# Altium PCB Audio_testboard.PcbDoc (part 5 of 6)
Units mm, origin at the board's own origin, x right, y up, seen from the top; angles counter-clockwise.
Board outline 220.73 x 144.32 mm, 4 copper layers (Top Layer, Mid-Layer 1, Mid-Layer 2, Bottom Layer), stack 1.894 mm thick; 462 components, 310 nets, 1757 pads, 740 vias.
Unrouted connection lines stored in the file: 5.
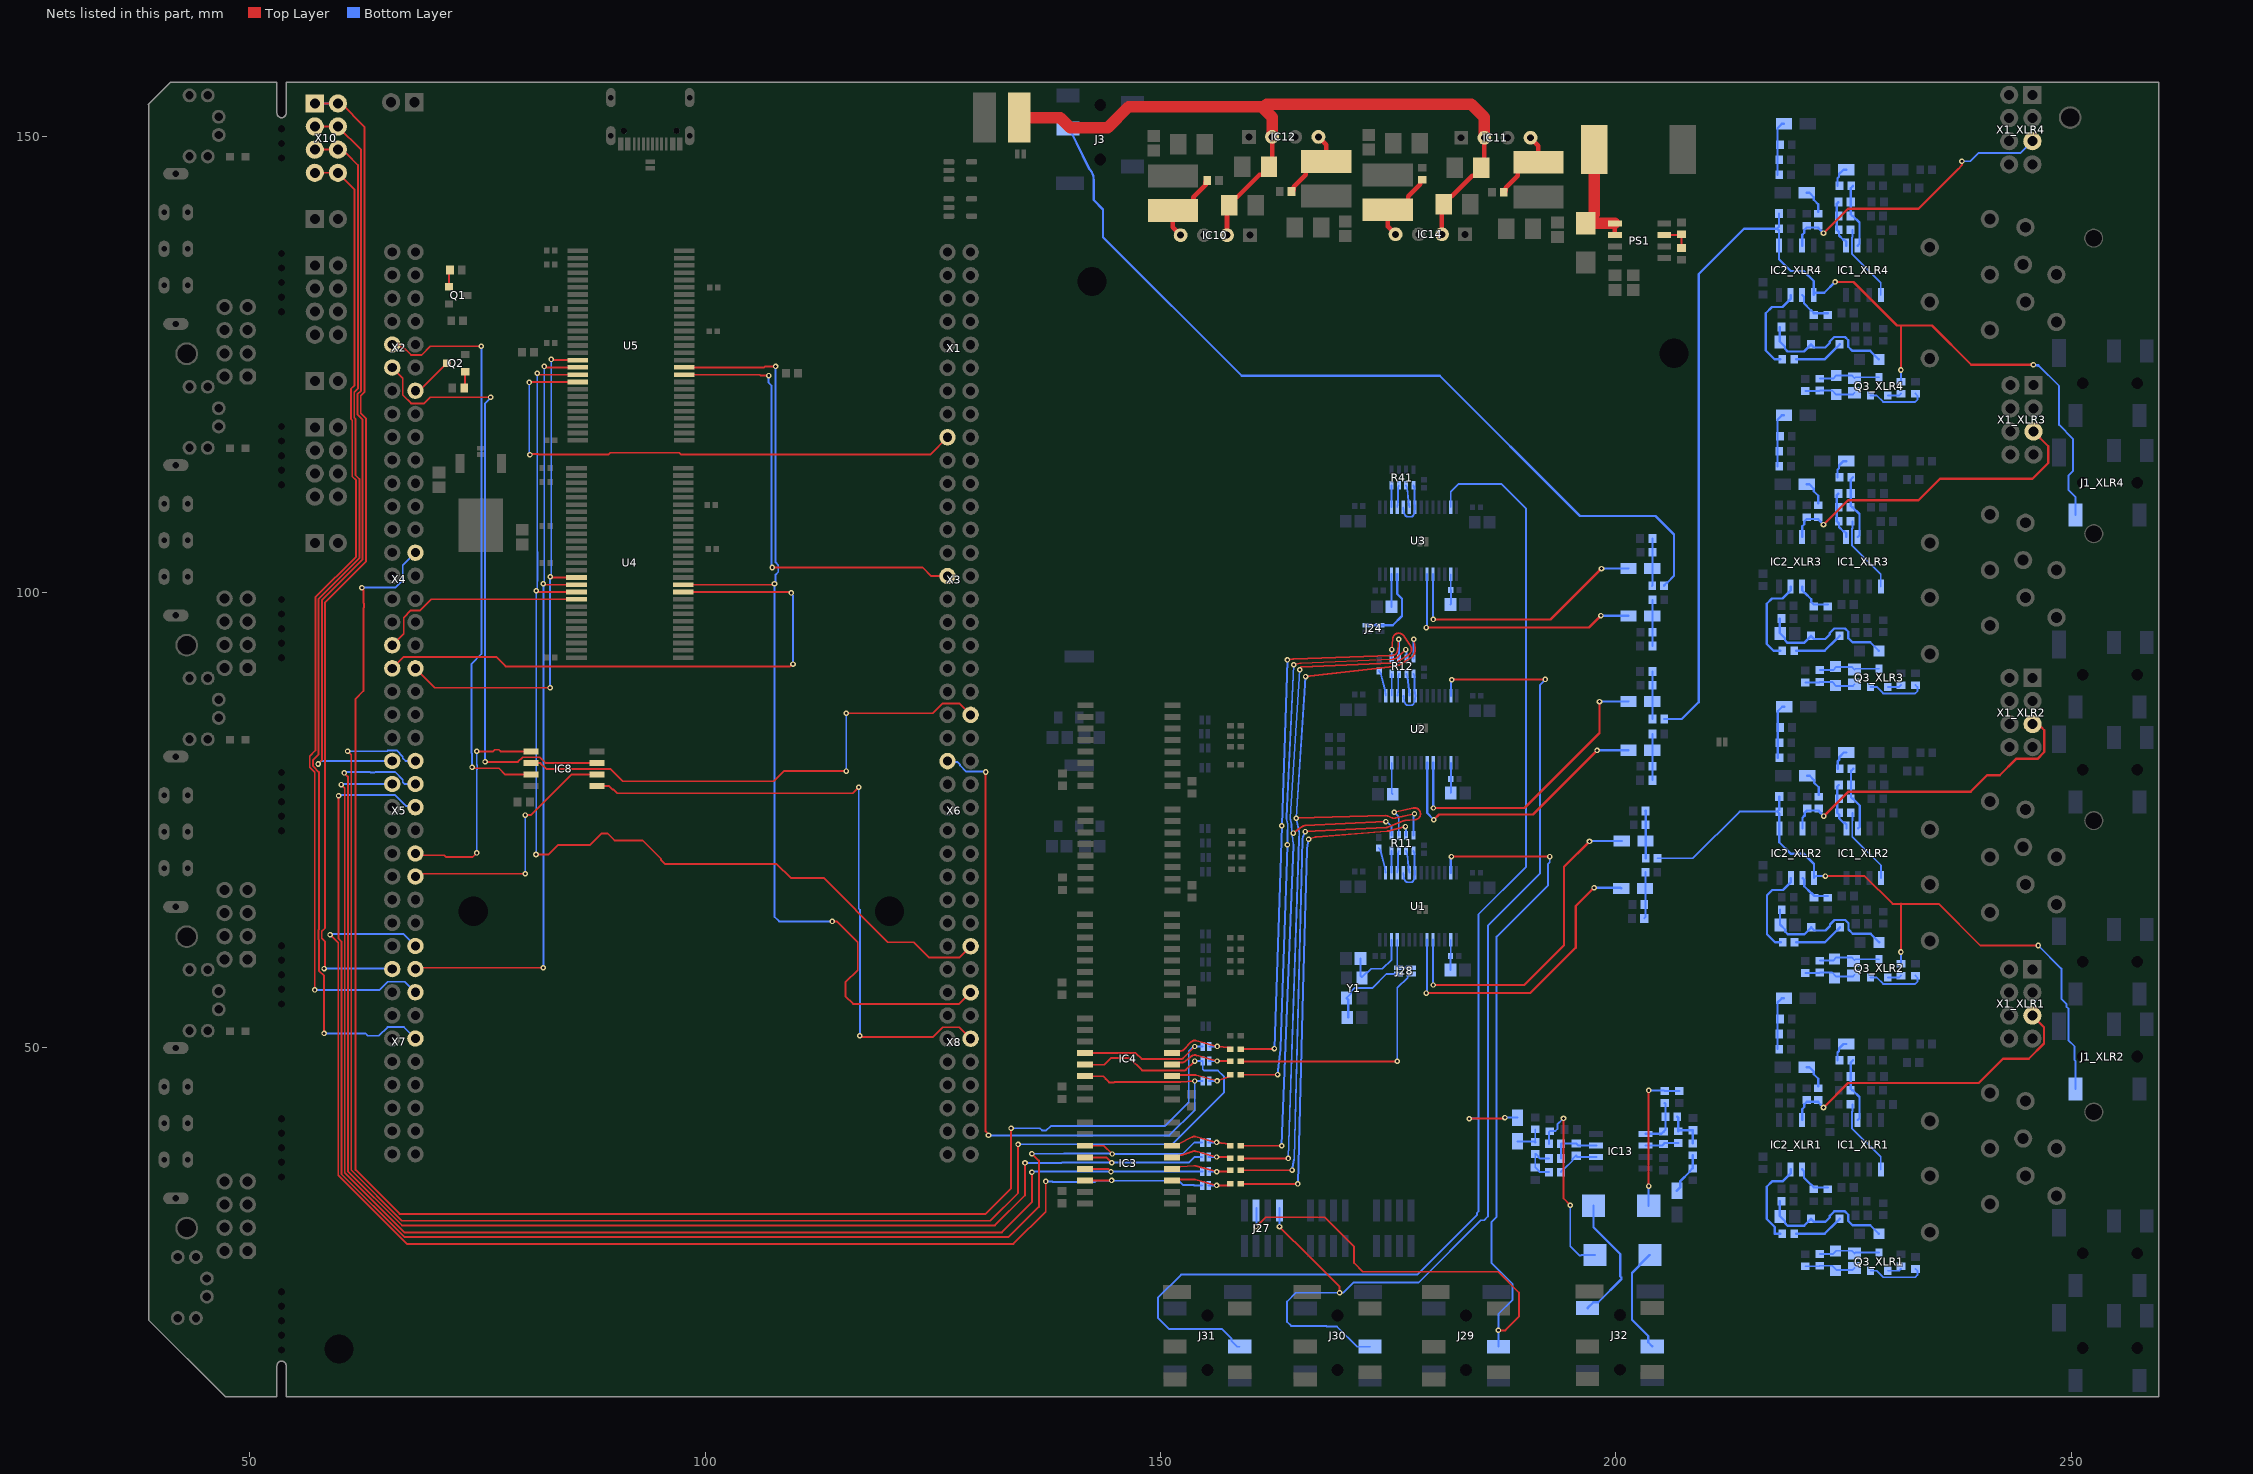
[diagram p6: the nets of this part, all layers, seen from the top]

## Via types
v1: diameter 0.61, hole 0.305, Top Layer to Bottom Layer, 321 vias
v2: diameter 0.6, hole 0.3, Top Layer to Bottom Layer, tented both sides, 219 vias
v3: diameter 0.61, hole 0.305, Top Layer to Bottom Layer, tented both sides, 190 vias
v4: diameter 1.27, hole 0.711, Top Layer to Bottom Layer, 8 vias
v5: diameter 0.6, hole 0.3, Top Layer to Bottom Layer, 2 vias

## Nets (pads, with @x,y where several pads share a name; then routed paths per layer and width w, separated by ;. In a path a pad name is that pad's centre, name@x,y a point inside that pad or via, vN(x,y) a via of type N, cw(c..) or ccw(c..) an arc to the next point about the centre after c; other vN are vias at no path point) (continued)
NetC6_XLR1_2: C6_XLR1.2 IC1_XLR1.2 R7_XLR1.2 R8_XLR1.2 | length 7.2
  Bottom Layer w0.254: R7_XLR1.2@226.044,48.615 225.79,48.361 225.79,45.489 225.966,45.313 226.016,45.313 226.746,44.583 226.746,42.25 IC1_XLR1.2@226.552,42.056
NetC6_XLR2_1: C6_XLR2.1 IC1_XLR2.1 R1_XLR2.1 R8_XLR2.1 | length 5.3
  Bottom Layer w0.254: C6_XLR2.1@224.472,78.837 224.298,78.663 224.298,75.789 224.534,75.553 224.534,75.157 224.999,74.692 225.116,74.692 225.314,74.494 IC1_XLR2.1@225.314,74.056
NetC6_XLR2_2: C6_XLR2.2 IC1_XLR2.2 R7_XLR2.2 R8_XLR2.2 | length 7.2
  Bottom Layer w0.254: R7_XLR2.2@226.076,80.615 225.822,80.361 225.822,77.489 225.998,77.313 226.048,77.313 226.778,76.583 226.778,74.25 IC1_XLR2.2@226.584,74.056
NetC6_XLR3_1: C6_XLR3.1 IC1_XLR3.1 R1_XLR3.1 R8_XLR3.1 | length 5.3
  Bottom Layer w0.254: C6_XLR3.1@224.44,110.837 224.266,110.663 224.266,107.789 224.502,107.553 224.502,107.157 224.967,106.692 225.084,106.692 225.282,106.494 IC1_XLR3.1@225.282,106.056
NetC6_XLR3_2: C6_XLR3.2 IC1_XLR3.2 R7_XLR3.2 R8_XLR3.2 | length 7.2
  Bottom Layer w0.254: R7_XLR3.2@226.044,112.615 225.79,112.361 225.79,109.489 225.966,109.313 226.016,109.313 226.746,108.583 226.746,106.25 IC1_XLR3.2@226.552,106.056
NetC6_XLR4_1: C6_XLR4.1 IC1_XLR4.1 R1_XLR4.1 R8_XLR4.1 | length 5.3
  Bottom Layer w0.254: C6_XLR4.1@224.44,142.837 224.266,142.663 224.266,139.789 224.502,139.553 224.502,139.157 224.967,138.692 225.084,138.692 225.282,138.493 IC1_XLR4.1@225.282,138.056
NetC6_XLR4_2: C6_XLR4.2 IC1_XLR4.2 R7_XLR4.2 R8_XLR4.2 | length 7.2
  Bottom Layer w0.254: R7_XLR4.2@226.044,144.615 225.79,144.361 225.79,141.489 225.966,141.313 226.016,141.313 226.746,140.583 226.746,138.25 IC1_XLR4.2@226.552,138.056
NetC7_XLR1_1: C7_XLR1.1 R7_XLR1.1 | length 2.3
  Bottom Layer w0.254: R7_XLR1.1@224.344,48.615 224.344,49.455 224.509,49.62 224.509,49.905 224.997,50.393 C7_XLR1.1@225.282,50.393
NetC7_XLR2_1: C7_XLR2.1 R7_XLR2.1 | length 2.3
  Bottom Layer w0.254: R7_XLR2.1@224.376,80.615 224.376,81.455 224.541,81.62 224.541,81.905 225.029,82.393 C7_XLR2.1@225.314,82.393
NetC7_XLR3_1: C7_XLR3.1 R7_XLR3.1 | length 2.3
  Bottom Layer w0.254: R7_XLR3.1@224.344,112.615 224.344,113.455 224.509,113.62 224.509,113.905 224.997,114.393 C7_XLR3.1@225.282,114.393
NetC7_XLR4_1: C7_XLR4.1 R7_XLR4.1 | length 2.3
  Bottom Layer w0.254: R7_XLR4.1@224.344,144.615 224.344,145.455 224.509,145.62 224.509,145.905 224.997,146.393 C7_XLR4.1@225.282,146.393
NetC12_XLR1_1: C12_XLR1.1 R14_XLR1.2 R15_XLR1.2 R16_XLR1.1 | length 6
  Bottom Layer w0.254: R16_XLR1.1@217.74,49.84 217.74,51.491 217.74,54.94 218.228,55.428 C12_XLR1.1@218.462,55.428
NetC12_XLR2_1: C12_XLR2.1 R14_XLR2.2 R15_XLR2.2 R16_XLR2.1 | length 6
  Bottom Layer w0.254: R16_XLR2.1@217.772,81.84 217.772,83.491 217.772,86.94 218.26,87.428 C12_XLR2.1@218.494,87.428
NetC12_XLR3_1: C12_XLR3.1 R14_XLR3.2 R15_XLR3.2 R16_XLR3.1 | length 6
  Bottom Layer w0.254: R16_XLR3.1@217.74,113.84 217.74,115.491 217.74,118.94 218.228,119.428 C12_XLR3.1@218.462,119.428
NetC12_XLR4_1: C12_XLR4.1 R14_XLR4.2 R15_XLR4.2 R16_XLR4.1 | length 6
  Bottom Layer w0.254: R16_XLR4.1@217.74,145.84 217.74,147.491 217.74,150.94 218.228,151.428 C12_XLR4.1@218.462,151.428
NetC13_1: C13.1 U1.20 | length 34.8
  Top Layer w0.254: v2(179.18,55.988) 190.608,55.988 195.58,60.96 195.58,65.532 v1(197.612,67.564)
  Bottom Layer w0.254: v2(179.18,55.988) 179.18,56.082 179.256,56.158 U1.20@179.256,61.83 ; v1(197.612,67.564) 200.507,67.564 C13.1@200.585,67.486
NetC13_2: C13.2 C17.2 R1.2 R3.2 | length 5.1
  Bottom Layer w0.203: C17.2@203.125,64.184 203.252,64.311 R1.2@203.252,69.264
NetC13_XLR1_2: C13_XLR1.2 D1_XLR1.2 D2_XLR1.1 R20_XLR1.2 | length 15.5
  Bottom Layer w0.254: R20_XLR1.2@217.994,33.121 217.994,31.519 218.566,30.947 218.566,30.73 218.856,30.44 220.67,30.44 D1_XLR1.2@221.421,31.191 ; D1_XLR1.2@221.421,31.216 D1_XLR1.2@221.421,31.191 ; D2_XLR1.1@228.872,29.565 227.938,30.499 225.979,30.499 225.518,30.96 225.518,31.661 225.158,32.021 223.984,32.021 223.486,31.523 223.486,31.363 222.989,30.865 222.368,30.865 222.365,30.868 221.744,30.868 D1_XLR1.2@221.421,31.191
NetC13_XLR2_2: C13_XLR2.2 D1_XLR2.2 D2_XLR2.1 R20_XLR2.2 | length 15.5
  Bottom Layer w0.254: R20_XLR2.2@218.026,65.121 218.026,63.519 218.598,62.947 218.598,62.73 218.888,62.44 220.702,62.44 D1_XLR2.2@221.453,63.191 ; D1_XLR2.2@221.453,63.216 D1_XLR2.2@221.453,63.191 ; D2_XLR2.1@228.904,61.565 227.97,62.499 226.011,62.499 225.55,62.96 225.55,63.661 225.19,64.021 224.016,64.021 223.518,63.523 223.518,63.363 223.021,62.865 222.4,62.865 222.397,62.868 221.776,62.868 D1_XLR2.2@221.453,63.191
NetC13_XLR3_2: C13_XLR3.2 D1_XLR3.2 D2_XLR3.1 R20_XLR3.2 | length 15.5
  Bottom Layer w0.254: R20_XLR3.2@217.994,97.121 217.994,95.519 218.566,94.947 218.566,94.73 218.856,94.44 220.67,94.44 D1_XLR3.2@221.421,95.191 ; D1_XLR3.2@221.421,95.216 D1_XLR3.2@221.421,95.191 ; D2_XLR3.1@228.872,93.565 227.938,94.499 225.979,94.499 225.518,94.96 225.518,95.661 225.158,96.021 223.984,96.021 223.486,95.523 223.486,95.363 222.989,94.865 222.368,94.865 222.365,94.868 221.744,94.868 D1_XLR3.2@221.421,95.191
NetC13_XLR4_2: C13_XLR4.2 D1_XLR4.2 D2_XLR4.1 R20_XLR4.2 | length 15.5
  Bottom Layer w0.254: R20_XLR4.2@217.994,129.121 217.994,127.519 218.566,126.947 218.566,126.73 218.856,126.44 220.67,126.44 D1_XLR4.2@221.421,127.191 ; D1_XLR4.2@221.421,127.216 D1_XLR4.2@221.421,127.191 ; D2_XLR4.1@228.872,125.565 227.938,126.499 225.979,126.499 225.518,126.96 225.518,127.661 225.158,128.021 223.984,128.021 223.486,127.523 223.486,127.363 222.989,126.865 222.368,126.865 222.365,126.868 221.744,126.868 D1_XLR4.2@221.421,127.191
NetC14_1: C14.1 U2.20 | length 31.1
  Top Layer w0.254: v2(180.016,75.021) 180.584,75.589 190.905,75.589 v1(197.945,82.629)
  Bottom Layer w0.254: U2.20@179.282,81.261 179.282,75.756 v2(180.016,75.021) ; v1@197.918,82.66 C14.1@201.394,82.66
NetC14_2: C14.2 C18.2 R2.2 R4.2 | length 5.1
  Bottom Layer w0.203: C18.2@204.014,79.358 R4.2@204.014,80.882 C14.2@204.014,82.66 R2.2@204.014,84.438
NetC14_XLR1_1: C14_XLR1.1 R13_XLR1.1 | length 2.8
  Bottom Layer w0.254: C14_XLR1.1@220.964,47.853 221.249,47.853 221.737,47.365 221.737,47.08 222.234,46.583 R13_XLR1.1@222.234,45.743
NetC14_XLR2_1: C14_XLR2.1 R13_XLR2.1 | length 2.8
  Bottom Layer w0.254: C14_XLR2.1@220.996,79.853 221.281,79.853 221.769,79.365 221.769,79.08 222.266,78.583 R13_XLR2.1@222.266,77.743
NetC14_XLR3_1: C14_XLR3.1 R13_XLR3.1 | length 2.8
  Bottom Layer w0.254: C14_XLR3.1@220.964,111.853 221.249,111.853 221.737,111.365 221.737,111.08 222.234,110.583 R13_XLR3.1@222.234,109.743
NetC14_XLR4_1: C14_XLR4.1 R13_XLR4.1 | length 2.8
  Bottom Layer w0.254: C14_XLR4.1@220.964,143.853 221.249,143.853 221.737,143.365 221.737,143.08 222.234,142.583 R13_XLR4.1@222.234,141.743
NetC19_1: C19.1 U1.19 | length 37.2
  Top Layer w0.254: v2(179.942,56.877) 189.942,56.877 194.31,61.245 194.31,69.85 v1(197.104,72.644)
  Bottom Layer w0.203: v2@179.917,56.902 v2(179.942,56.877)
  Bottom Layer w0.254: v2@179.917,56.902 U1.19@179.917,61.83 ; v1@197.095,72.693 C19.1@200.632,72.693
NetC19_2: C19.2 C21.2 R5.2 R7.2 | length 5.2
  Bottom Layer w0.305: C21.2@203.252,75.995 203.282,75.965 R5.2@203.282,70.788
NetC20_1: C20.1 U2.19 | length 33.3
  Top Layer w0.254: v2(179.967,76.308) 189.967,76.308 198.207,84.547 v1(198.207,87.997)
  Bottom Layer w0.203: v2@179.942,76.333 v2(179.967,76.308)
  Bottom Layer w0.254: v2@179.942,76.333 U2.19@179.942,81.261 ; v1(198.207,87.997) 201.391,87.997 C20.1@201.394,87.994
NetC20_2: C20.2 C22.2 R6.2 R8.2 | length 5.2
  Bottom Layer w0.203: R6.2@204.014,86.089 C20.2@204.014,87.994 R8.2@204.014,89.772 C22.2@204.014,91.296
NetC27_1: C27.1 C28.1 U1.16 | length 3.3
  Bottom Layer w0.203: C28.1@181.847,58.528 C27.1@181.847,60.052 181.872,60.077 U1.16@181.872,61.83
NetC29_1: C29.1 C30.1 U2.16 | length 3.3
  Bottom Layer w0.203: C30.1@181.872,77.959 181.898,77.984 C29.1@181.898,79.508 U2.16@181.898,81.261
NetC31_1: C31.1 U2.26 | length 3.5
  Bottom Layer w0.203: U2.26@175.395,81.261 175.395,77.934 C31.1@175.497,77.832
NetC32_1: C32.1 J28.4 Y1.1 | length 9.1
  Bottom Layer w0.203: Y1.1@170.417,55.439 170.915,55.937 170.915,56.147 171.297,56.528 173.243,56.528 174.797,58.082 J28.4@176.132,58.082
  Bottom Layer w0.254: Y1.1@170.417,55.439 170.633,55.223 C32.1@170.633,53.321
NetC33_1: C33.1 U1.26 Y1.3 | length 8.3
  Bottom Layer w0.203: C33.1@171.979,59.798 171.979,57.877 172.117,57.739 172.615,58.237 172.715,58.237 173.133,58.655 174.354,58.655 175.37,59.671 U1.26@175.37,61.83
NetC45_1: C45.1 U3.20 | length 28.6
  Top Layer w0.254: v2(179.18,96.12) 197.043,96.12 v1(198.355,97.433)
  Bottom Layer w0.254: v2(179.18,96.12) 179.18,96.214 179.256,96.29 U3.20@179.256,101.962 ; v1(198.355,97.433) 201.353,97.433 C45.1@201.394,97.392
NetC45_2: C45.2 C47.2 R37.2 R38.2 | length 5.1
  Bottom Layer w0.203: C47.2@204.014,94.09 R38.2@204.014,95.614 C45.2@204.014,97.392 R37.2@204.014,99.17
NetC48_1: C48.1 U3.19 | length 28.7
  Top Layer w0.203: v2(179.942,97.009) v2@179.946,97.013
  Top Layer w0.254: v2@179.946,97.013 192.835,97.013 v1(198.424,102.602)
  Bottom Layer w0.203: v2@179.917,97.034 v2(179.942,97.009)
  Bottom Layer w0.254: v2@179.917,97.034 U3.19@179.917,101.962 ; v1(198.424,102.602) 201.391,102.602 C48.1@201.394,102.599
NetC48_2: C48.2 C49.2 R39.2 R40.2 | length 5.2
  Bottom Layer w0.203: R39.2@203.984,100.694 204.014,100.724 C48.2@204.014,102.599 R40.2@204.014,104.377 C49.2@204.014,105.901
NetC50_1: C50.1 C51.1 U3.16 | length 3.3
  Bottom Layer w0.203: C51.1@181.847,98.66 181.898,98.711 C50.1@181.898,100.235 ; C50.1@181.872,100.235 U3.16@181.872,101.962
NetC52_1: C52.1 U3.26 | length 3.6
  Bottom Layer w0.254: C52.1@175.37,98.406 U3.26@175.37,101.962
NetC74_1: C74.1 C77.1 C80.1 C95.1 IC10.2 IC11.2 IC12.2 IC14.2 L3.1 | length 85.2
  Top Layer w0.508: IC10.2@157.3,139.2 157.3,142.16 C74.1@157.59,142.45 ; C74.1@157.54,142.5 157.54,142.715 158.186,143.361 158.401,143.361 160.879,145.839 161.274,145.839 161.92,146.485 C80.1@161.92,146.7 162.26,147.04 IC12.2@162.26,150 ; IC14.2@180.9,139.3 180.9,142.26 C95.1@181.17,142.53 ; C95.1@181.1,142.6 181.1,142.815 181.746,143.461 181.961,143.461 184.239,145.739 184.574,145.739 185.22,146.385 C77.1@185.22,146.6 185.56,146.94 IC11.2@185.56,149.9
  Top Layer w1.27: L3.1@134.5,152.1 139,152.1 140.1,151 144.2,151 146.5,153.3 161.1,153.3 ; IC12.2@162.26,150 162.26,152.14 161.1,153.3 ; IC11.2@185.56,149.9 185.56,152.14 184.138,153.562 161.671,153.562 161.408,153.3 161.1,153.3
NetC81_1: C81.1 IC13.1 R48.2 R51.1 | length 5.4
  Bottom Layer w0.254: IC13.1@203.262,40.532 205.005,40.532 C81.1@205.25,40.777 205.45,40.977 R48.2@205.45,42.427 205.45,43.827 R51.1@205.35,43.927
NetC81_2: C81.2 IC13.2 R50.2 | length 3.7
  Bottom Layer w0.254: IC13.2@203.262,39.262 205.085,39.262 C81.2@205.25,39.427 205.35,39.527 R50.2@206.85,39.527
NetC82_2: C82.2 R49.1 R52.1 | length 4.6
  Bottom Layer w0.254: C82.2@206.7,34.3 207.083,34.683 207.083,35.36 208.102,36.379 208.102,36.429 208.4,36.727 R52.1@208.45,36.727 R49.1@208.45,38.177
NetC83_1: C83.1 R51.2 R53.2 | length 16.1
  Top Layer w0.203: v1(203.6,34.8) v1(203.6,45.3)
  Bottom Layer w0.203: C83.1@203.6,32.627 v1(203.6,34.8) ; v1(203.6,45.3) 205.277,45.3 R51.2@205.35,45.227
  Bottom Layer w0.254: R51.2@205.35,45.227 R53.2@206.95,45.227
NetC84_2: C84.2 R48.1 R49.2 R50.1 | length 4.7
  Bottom Layer w0.254: R48.1@206.75,42.427 206.85,42.327 R50.1@206.85,40.827 206.95,40.927 C84.2@208.45,40.927 R49.2@208.45,39.477
NetC85_1: C85.1 IC13.7 R54.2 R57.1 | length 5.6
  Bottom Layer w0.203: R54.2@193.97,37.827 R57.1@193.97,39.427 194.02,39.477 C85.1@195.65,39.477
  Bottom Layer w0.254: C85.1@195.65,39.477 195.865,39.262 IC13.7@197.838,39.262
NetC85_2: C85.2 IC13.6 R56.2 | length 4.8
  Bottom Layer w0.203: R56.2@193.97,36.327 193.97,36.377 194.293,36.701 194.343,36.701 195.252,37.609 195.252,37.779 195.6,38.127 C85.2@195.65,38.127
  Bottom Layer w0.254: C85.2@195.65,38.127 195.785,37.992 IC13.6@197.838,37.992
NetC86_2: C86.2 R55.1 R58.1 | length 3.4
  Bottom Layer w0.203: R55.1@191.15,39.627 R58.1@191.15,41.027
  Bottom Layer w0.254: C86.2@189.2,39.7 191.077,39.7 R55.1@191.15,39.627
NetC87_1: C87.1 R57.2 R59.2 | length 21.3
  Top Layer w0.203: v1(194.25,42.227) 194.25,33.45 v1(195,32.7)
  Bottom Layer w0.203: R57.2@192.67,39.427 192.67,40.747 R59.2@192.75,40.827 192.775,40.852 193.375,40.852 193.596,41.073 193.596,41.632 193.745,41.781 193.804,41.781 v1(194.25,42.227) ; v1(195,32.7) 195,28.2 196.026,27.174 196.174,27.174 196.227,27.227 C87.1@197.7,27.227
NetC88_2: C88.2 R54.1 R55.2 R56.1 | length 5
  Bottom Layer w0.203: R56.1@192.67,36.327 191.653,36.327 191.548,36.431 191.548,36.479 191.2,36.827 C88.2@191.15,36.827 R55.2@191.15,38.327 191.2,38.327 191.523,38.004 191.523,37.954 191.65,37.827 R54.1@192.67,37.827
NetC96_XLR1_1: C96_XLR1.1 D4_XLR1.2 Q3_XLR1.3 R64_XLR1.1 | length 6.7
  Bottom Layer w0.203: R64_XLR1.1@222.4,27.35 223.85,27.35 224.2,27.7 225.9,27.7 C96_XLR1.1@226.2,27.4 C96_XLR1.1@226.25,27.45 ; C96_XLR1.1@226.3,27.5 Q3_XLR1.3@228.9,27.5
NetC96_XLR1_2: C96_XLR1.2 D4_XLR1.1 R63_XLR1.1 R64_XLR1.2 | length 5.7
  Bottom Layer w0.203: R63_XLR1.1@220.8,26 222.35,26 R64_XLR1.2@222.4,26.05 223.75,26.05 224.2,25.6 226,25.6 C96_XLR1.2@226.2,25.8
NetC96_XLR2_1: C96_XLR2.1 D4_XLR2.2 Q3_XLR2.3 R64_XLR2.1 | length 6.7
  Bottom Layer w0.203: R64_XLR2.1@222.4,59.55 223.85,59.55 224.2,59.9 225.9,59.9 226.2,59.6 C96_XLR2.1@226.25,59.65 ; C96_XLR2.1@226.3,59.7 Q3_XLR2.3@228.9,59.7
NetC96_XLR2_2: C96_XLR2.2 D4_XLR2.1 R63_XLR2.1 R64_XLR2.2 | length 5.7
  Bottom Layer w0.203: R63_XLR2.1@220.8,58.2 222.35,58.2 R64_XLR2.2@222.4,58.25 223.75,58.25 224.2,57.8 226,57.8 C96_XLR2.2@226.2,58
NetC96_XLR3_1: C96_XLR3.1 D4_XLR3.2 Q3_XLR3.3 R64_XLR3.1 | length 6.7
  Bottom Layer w0.203: R64_XLR3.1@222.4,91.45 223.85,91.45 224.2,91.8 225.9,91.8 C96_XLR3.1@226.2,91.5 C96_XLR3.1@226.25,91.55 ; C96_XLR3.1@226.3,91.6 Q3_XLR3.3@228.9,91.6
NetC96_XLR3_2: C96_XLR3.2 D4_XLR3.1 R63_XLR3.1 R64_XLR3.2 | length 5.7
  Bottom Layer w0.203: R63_XLR3.1@220.8,90.1 222.35,90.1 R64_XLR3.2@222.4,90.15 223.75,90.15 224.2,89.7 226,89.7 C96_XLR3.2@226.2,89.9
NetC96_XLR4_1: C96_XLR4.1 D4_XLR4.2 Q3_XLR4.3 R64_XLR4.1 | length 6.7
  Bottom Layer w0.203: R64_XLR4.1@222.4,123.45 223.85,123.45 D4_XLR4.2@224.2,123.8 225.9,123.8 C96_XLR4.1@226.2,123.5 C96_XLR4.1@226.25,123.55 ; C96_XLR4.1@226.3,123.6 Q3_XLR4.3@228.9,123.6
NetC96_XLR4_2: C96_XLR4.2 D4_XLR4.1 R63_XLR4.1 R64_XLR4.2 | length 5.7
  Bottom Layer w0.203: R63_XLR4.1@220.8,122.1 222.35,122.1 R64_XLR4.2@222.4,122.15 223.75,122.15 D4_XLR4.1@224.2,121.7 226,121.7 C96_XLR4.2@226.2,121.9
NetD1_XLR1_1: D1_XLR1.1 R18_XLR1.2 | length 5.5
  Bottom Layer w0.254: R18_XLR1.2@219.782,29.565 222.92,29.565 224.223,30.868 224.248,30.868 224.571,31.191 D1_XLR1.1@224.571,31.216
NetD1_XLR2_1: D1_XLR2.1 R18_XLR2.2 | length 5.5
  Bottom Layer w0.254: R18_XLR2.2@219.814,61.565 222.952,61.565 224.255,62.868 224.28,62.868 224.603,63.191 D1_XLR2.1@224.603,63.216
NetD1_XLR3_1: D1_XLR3.1 R18_XLR3.2 | length 5.5
  Bottom Layer w0.254: R18_XLR3.2@219.782,93.565 222.92,93.565 224.223,94.868 224.248,94.868 224.571,95.191 D1_XLR3.1@224.571,95.216
NetD1_XLR4_1: D1_XLR4.1 R18_XLR4.2 | length 5.5
  Bottom Layer w0.254: R18_XLR4.2@219.782,125.565 222.92,125.565 224.223,126.868 224.248,126.868 224.571,127.191 D1_XLR4.1@224.571,127.216
NetD3_1: D3.1 L1.2 PS1.5 PS1.6 | length 12.1
  Top Layer w0.508: PS1.5@199.883,140.5 199.888,140.495 PS1.6@199.888,139.235
  Top Layer w1.27: D3.1@196.7,140.5 PS1.5@199.883,140.5 ; D3.1@197.233,141.09 197.65,141.507 L1.2@197.65,148.6
NetIC1_XLR1_5: IC1_XLR1.5 R1_XLR1.2 | length 8.5
  Bottom Layer w0.203: R1_XLR1.2@225.966,43.789 225.966,42.989 225.922,42.945 225.922,41.167 229.092,37.997 IC1_XLR1.5@229.092,36.632
NetIC1_XLR2_5: IC1_XLR2.5 R1_XLR2.2 | length 8.5
  Bottom Layer w0.203: R1_XLR2.2@225.998,75.789 225.998,74.989 225.954,74.945 225.954,73.167 229.124,69.997 IC1_XLR2.5@229.124,68.632
NetIC1_XLR3_5: IC1_XLR3.5 R1_XLR3.2 | length 8.5
  Bottom Layer w0.203: R1_XLR3.2@225.966,107.789 225.966,106.989 225.922,106.945 225.922,105.167 229.092,101.997 IC1_XLR3.5@229.092,100.632
NetIC1_XLR4_5: IC1_XLR4.5 R1_XLR4.2 | length 8.5
  Bottom Layer w0.203: R1_XLR4.2@225.966,139.789 225.966,138.989 225.922,138.945 225.922,137.167 229.092,133.997 IC1_XLR4.5@229.092,132.632
NetIC2_XLR1_6: IC2_XLR1.6 R17_XLR1.2 R19_XLR1.1 | length 4.1
  Bottom Layer w0.254: IC2_XLR1.6@220.456,36.632 220.654,36.434 220.654,35.717 221.403,34.968 221.453,34.968 221.726,34.695 221.726,34.645 R19_XLR1.1@223.25,34.645
NetIC2_XLR1_7: IC2_XLR1.7 R18_XLR1.1 | length 9.8
  Bottom Layer w0.254: R18_XLR1.1@218.082,29.565 217.454,29.565 217.454,30.314 216.57,31.198 216.57,34.732 217.151,35.313 218.305,35.313 219.186,36.195 IC2_XLR1.7@219.186,36.632
NetIC2_XLR2_6: IC2_XLR2.6 R17_XLR2.2 R19_XLR2.1 | length 4.1
  Bottom Layer w0.254: IC2_XLR2.6@220.488,68.632 220.686,68.434 220.686,67.717 221.435,66.968 221.485,66.968 221.758,66.695 221.758,66.645 R19_XLR2.1@223.282,66.645
NetIC2_XLR2_7: IC2_XLR2.7 R18_XLR2.1 | length 9.8
  Bottom Layer w0.254: R18_XLR2.1@218.114,61.565 217.486,61.565 216.602,62.449 216.602,66.732 217.183,67.313 218.337,67.313 219.218,68.195 IC2_XLR2.7@219.218,68.632
NetIC2_XLR3_6: IC2_XLR3.6 R17_XLR3.2 R19_XLR3.1 | length 4
  Bottom Layer w0.254: IC2_XLR3.6@220.456,100.632 220.456,100.195 220.732,99.919 220.752,99.919 221.453,99.218 221.453,98.918 221.726,98.645 R19_XLR3.1@223.25,98.645
NetIC2_XLR3_7: IC2_XLR3.7 R18_XLR3.1 | length 9.9
  Bottom Layer w0.254: R18_XLR3.1@218.082,93.565 217.318,93.565 216.57,94.313 216.57,98.732 217.151,99.313 218.305,99.313 219.186,100.195 IC2_XLR3.7@219.186,100.632
NetIC2_XLR4_6: IC2_XLR4.6 R17_XLR4.2 R19_XLR4.1 | length 4.1
  Bottom Layer w0.254: IC2_XLR4.6@220.456,132.632 220.654,132.434 220.654,131.717 221.403,130.968 221.453,130.968 221.726,130.695 221.726,130.645 R19_XLR4.1@223.25,130.645
NetIC2_XLR4_7: IC2_XLR4.7 R18_XLR4.1 | length 9.9
  Bottom Layer w0.254: R18_XLR4.1@218.082,125.565 217.454,125.565 216.468,126.551 216.468,130.63 217.151,131.313 218.305,131.313 219.186,132.195 IC2_XLR4.7@219.186,132.632
NetIC10_4: IC10.4 L2.2 R60.2 | length 8.7
  Top Layer w0.508: IC10.4@152.22,139.2 151.36,140.06 L2.2@151.36,141.9 152.627,141.9 153.623,142.896 153.623,143.363 154.939,144.679 154.939,145.029 155.11,145.2 R60.2@155.16,145.2
NetIC11_4: IC11.4 L4.2 R61.2 | length 8.7
  Top Layer w0.508: R61.2@187.7,143.9 187.75,143.9 187.921,144.071 187.921,144.421 189.237,145.737 189.237,146.204 190.233,147.2 L4.2@191.5,147.2 191.5,149.04 IC11.4@190.64,149.9
NetIC12_4: IC12.4 L6.2 R62.2 | length 8.7
  Top Layer w0.508: R62.2@164.4,144 164.45,144 164.621,144.171 164.621,144.521 165.937,145.837 165.937,146.304 166.933,147.3 L6.2@168.2,147.3 168.2,149.14 IC12.4@167.34,150
NetIC14_4: IC14.4 L5.2 R46.2 | length 8.7
  Top Layer w0.508: IC14.4@175.82,139.3 174.96,140.16 L5.2@174.96,142 176.227,142 177.223,142.996 177.223,143.463 178.539,144.779 178.539,145.129 178.71,145.3 R46.2@178.76,145.3
NetJ24_1: J24.1 J24.3 U3.25 | length 9
  Bottom Layer w0.254: J24.3@174.1,96.374 175.497,96.374 176.513,97.39 176.513,99.295 176.005,99.803 U3.25@176.005,101.962
  Bottom Layer w0.305: J24.1@172.7,96.374 J24.3@174.1,96.374
NetJ28_1: J28.1 J28.3 U1.25 | length 4.5
  Bottom Layer w0.203: U1.25@176.005,61.83 176.005,58.909 J28.3@176.132,58.782 J28.1@177.532,58.782
NetPS1_3: PS1.3 R45.1 R47.2 | length 3.4
  Top Layer w0.203: PS1.3@205.312,139.235 207.135,139.235 R47.2@207.2,139.3 R45.1@207.2,137.8
NetQ1_1: Q1.1 R106.2 | length 1.9
  Top Layer w0.203: Q1.1@71.898,133.538 71.898,135.286 R106.2@71.994,135.382
NetQ2_1: Q2.1 R107.2 | length 1.8
  Top Layer w0.203: R107.2@73.548,122.428 73.66,122.54 Q2.1@73.66,124.206
NetQ3_XLR1_1: Q3_XLR1.1 R65_XLR1.1 | length 1.5
  Bottom Layer w0.203: Q3_XLR1.1@229.85,25.5 231.1,25.5 R65_XLR1.1@231.3,25.7
NetQ3_XLR1_2: Q3_XLR1.2 R66_XLR1.2 | length 6.3
  Bottom Layer w0.203: Q3_XLR1.2@227.95,25.5 228.641,25.5 229.345,24.796 232.868,24.796 233.121,25.049 233.121,25.479 R66_XLR1.2@232.9,25.7
NetQ3_XLR2_1: Q3_XLR2.1 R65_XLR2.1 | length 1.5
  Bottom Layer w0.203: Q3_XLR2.1@229.85,57.7 231.1,57.7 R65_XLR2.1@231.3,57.9
NetQ3_XLR2_2: Q3_XLR2.2 R66_XLR2.2 | length 6.3
  Bottom Layer w0.203: Q3_XLR2.2@227.95,57.7 228.641,57.7 229.345,56.996 232.868,56.996 233.121,57.249 233.121,57.679 R66_XLR2.2@232.9,57.9
NetQ3_XLR3_1: Q3_XLR3.1 R65_XLR3.1 | length 1.5
  Bottom Layer w0.203: Q3_XLR3.1@229.85,89.6 231.1,89.6 R65_XLR3.1@231.3,89.8
NetQ3_XLR3_2: Q3_XLR3.2 R66_XLR3.2 | length 6.3
  Bottom Layer w0.203: Q3_XLR3.2@227.95,89.6 228.641,89.6 229.345,88.896 232.868,88.896 233.121,89.149 233.121,89.579 R66_XLR3.2@232.9,89.8
NetQ3_XLR4_1: Q3_XLR4.1 R65_XLR4.1 | length 1.5
  Bottom Layer w0.203: Q3_XLR4.1@229.85,121.6 231.1,121.6 R65_XLR4.1@231.3,121.8
NetQ3_XLR4_2: Q3_XLR4.2 R66_XLR4.2 | length 6.3
  Bottom Layer w0.203: Q3_XLR4.2@227.95,121.6 228.641,121.6 229.345,120.896 232.868,120.896 233.121,121.149 233.121,121.579 R66_XLR4.2@232.9,121.8
NetR11_5: R11.5 U1.5 U1.7 | length 5.3
  Bottom Layer w0.203: U1.5@176.665,69.196 176.742,68.561 176.882,68.31 ccw(c177.148,68.459) 177.148,68.155 177.504,68.155 ccw(c177.504,68.459) 177.781,68.333 177.885,68.561 U1.7@177.961,69.196 177.885,69.831 177.885,71.261 R11.5@177.77,71.609
NetR11_6: R11.6 U1.6 | length 2.4
  Bottom Layer w0.203: R11.6@176.97,71.609 177.093,71.261 177.25,69.831 U1.6@177.326,69.196
NetR11_7: R11.7 U1.4 | length 2.4
  Bottom Layer w0.203: U1.4@176.005,69.196 176.081,69.831 176.081,71.261 R11.7@176.17,71.609
NetR11_8: R11.8 U1.3 | length 2.4
  Bottom Layer w0.203: U1.3@175.37,69.196 R11.8@175.37,71.609
NetR12_1: R12.1 U2.5 U2.7 | length 5.3
  Bottom Layer w0.203: U2.5@176.691,88.627 176.767,87.992 176.908,87.741 ccw(c177.173,87.89) 177.173,87.586 177.529,87.586 ccw(c177.529,87.89) 177.806,87.764 177.91,87.992 U2.7@177.986,88.627 177.91,89.262 177.91,90.692 R12.1@177.795,91.04
NetR12_2: R12.2 U2.6 | length 2.4
  Bottom Layer w0.203: R12.2@176.995,91.04 177.119,90.692 177.275,89.262 U2.6@177.351,88.627
NetR12_3: R12.3 U2.4 | length 2.4
  Bottom Layer w0.203: U2.4@176.03,88.627 176.107,89.262 176.107,90.692 R12.3@176.195,91.04
NetR12_4: R12.4 U2.3 | length 2.4
  Bottom Layer w0.203: U2.3@175.395,88.627 R12.4@175.395,91.04
NetR15_1: R15.1 U1.2 | length 2.9
  Bottom Layer w0.203: R15.1@173.973,71.923 174.171,71.65 174.633,69.831 U1.2@174.71,69.196
NetR16_1: R16.1 U2.2 | length 2.9
  Bottom Layer w0.203: R16.1@173.998,91.354 174.197,91.081 174.659,89.262 U2.2@174.735,88.627
NetR41_1: R41.1 U3.5 U3.7 | length 5.3
  Bottom Layer w0.203: U3.5@176.665,109.328 176.742,108.693 176.882,108.442 ccw(c177.148,108.591) 177.148,108.287 177.504,108.287 ccw(c177.504,108.591) 177.781,108.465 177.885,108.693 U3.7@177.961,109.328 177.885,109.963 177.885,111.393 R41.1@177.77,111.741
NetR41_2: R41.2 U3.6 | length 2.4
  Bottom Layer w0.203: R41.2@176.97,111.741 177.093,111.393 177.25,109.963 U3.6@177.326,109.328
NetR41_3: R41.3 U3.4 | length 2.4
  Bottom Layer w0.203: U3.4@176.005,109.328 176.081,109.963 176.081,111.393 R41.3@176.17,111.741
NetR41_4: R41.4 U3.3 | length 2.4
  Bottom Layer w0.203: U3.3@175.37,109.328 R41.4@175.37,111.741
NRST: Q2.3 X2.14 | length 4.7
  Top Layer w0.203: X2.14@68.2,122.121 68.625,122.121 71.312,124.808 71.312,124.858 71.61,125.156 Q2.3@71.66,125.156
PAD_SW_XLR1: IC2_XLR1.3 R3_XLR1.2 R13_XLR1.2 X1_XLR1.5 | length 34.9
  Top Layer w0.254: v1(222.8,43.428) 222.819,43.428 225.497,46.106 239.844,46.106 242.506,48.768 245.323,48.768 247.008,50.453 247.008,52.244 X1_XLR1.5@245.729,53.523
  Bottom Layer w0.254: IC2_XLR1.3@220.456,42.056 220.456,43.236 220.691,43.471 220.691,43.77 220.964,44.043 222.234,44.043 222.234,43.993 222.507,43.72 222.512,43.72 v1@222.732,43.5
PAD_SW_XLR2: IC2_XLR2.3 R3_XLR2.2 R13_XLR2.2 X1_XLR2.5 | length 35.3
  Top Layer w0.254: v1(222.832,75.428) 222.851,75.428 225.529,78.106 238.96,78.106 240.759,79.905 242.142,79.905 243.94,81.704 246.291,81.704 247.04,82.453 247.04,84.857 246.708,85.189 246.095,85.189 X1_XLR2.5@245.761,85.523
  Bottom Layer w0.254: IC2_XLR2.3@220.488,74.056 220.488,75.236 220.723,75.471 220.723,75.77 220.996,76.043 222.266,76.043 222.266,75.993 222.539,75.72 222.544,75.72 v1@222.764,75.5
PAD_SW_XLR3: IC2_XLR3.3 R3_XLR3.2 R13_XLR3.2 X1_XLR3.5 | length 35.8
  Top Layer w0.254: v1(222.8,107.428) 222.819,107.428 225.497,110.106 233.232,110.106 235.584,112.458 245.749,112.458 247.476,114.185 247.476,116.026 X1_XLR3.5@245.856,117.646
  Bottom Layer w0.254: IC2_XLR3.3@220.456,106.056 220.456,107.236 220.691,107.471 220.691,107.77 220.964,108.043 222.234,108.043 222.234,107.993 222.507,107.72 222.512,107.72 v1@222.732,107.5
PAD_SW_XLR4: IC2_XLR4.3 R3_XLR4.2 R13_XLR4.2 X1_XLR4.5 | length 31.6
  Top Layer w0.203: 237.587,146.461 237.998,146.872 v1(237.998,147.32)
  Top Layer w0.254: v1(222.8,139.428) 222.819,139.428 225.497,142.106 233.232,142.106 237.587,146.461
  Bottom Layer w0.203: v1(237.998,147.32) 238.926,147.32 239.843,148.237 244.443,148.237 X1_XLR4.5@245.729,149.523
  Bottom Layer w0.254: IC2_XLR4.3@220.456,138.056 220.456,139.236 220.691,139.471 220.691,139.77 220.964,140.043 222.234,140.043 222.234,139.993 222.507,139.72 222.512,139.72 v1@222.732,139.5
PH_LOUT1: C83.2 J32.2 | length 14.4
  Bottom Layer w0.254: J32.2@196.9,21.4 197.535,22.035 198.073,22.035 200.624,24.585 200.624,24.754 200.475,24.902 200.475,27.347 197.55,30.272 C83.2@197.55,32.627
PH_ROUT1: C87.2 J32.5 | length 11.8
  Bottom Layer w0.254: C87.2@203.75,27.227 203.7,27.227 202.602,26.129 202.602,26.079 201.779,25.257 201.779,20.112 203.555,18.337 203.555,17.645 J32.5@204,17.2
QUADSPI_BK1_IO0: IC8.5 X5.14 | length 24.5
  Top Layer w0.203: X5.14@68.2,71.321 68.401,71.12 71.373,71.12 71.581,70.912 74.468,70.912 v1(74.93,71.374) ; v1(74.93,82.55) 74.96,82.52 76.737,82.52 76.915,82.698 77.377,82.698 77.555,82.52 IC8.5@80.912,82.52
  Bottom Layer w0.203: v1(74.93,71.374) 74.93,80.49 74.981,80.541 74.981,81.003 74.93,81.054 v1(74.93,82.55)
QUADSPI_BK1_IO1: IC8.2 X5.16 | length 28.3
  Top Layer w0.203: X5.16@68.2,68.781 68.506,69.086 69.101,69.086 69.103,69.088 v1(80.264,69.088) ; v1(80.259,75.53) 80.864,75.53 85.314,79.98 IC8.2@88.112,79.98
  Bottom Layer w0.203: v1(80.259,75.53) 80.259,69.093 v1(80.264,69.088)
QUADSPI_BK1_IO2: IC8.3 X2.11 | length 66.8
  Top Layer w0.203: X2.11@65.66,124.661 66.814,123.507 66.814,121.654 67.733,120.735 69.173,120.735 69.85,121.412 v1(76.454,121.412) ; v1(75.849,81.377) 79.458,81.377 79.961,81.88 81.863,81.88 82.493,81.25 IC8.3@88.112,81.25
  Bottom Layer w0.203: v1(75.849,81.377) 75.849,120.749 76.454,121.354 v1(76.454,121.412)
QUADSPI_BK1_IO3: IC8.7 X2.9 | length 64.2
  Top Layer w0.203: X2.9@65.66,127.201 65.887,126.974 66.795,126.974 67.722,126.047 68.897,126.047 69.85,127 v1(75.438,127) ; v1(74.422,80.772) 74.528,80.666 77.377,80.666 78.063,79.98 IC8.7@80.912,79.98
  Bottom Layer w0.203: v1(74.422,80.772) 74.422,82.268 74.371,82.319 74.371,92.151 75.438,93.218 v1(75.438,127)
QUADSPI_BK1_NCS: IC8.1 X8.10 | length 69.9
  Top Layer w0.203: IC8.1@88.112,78.71 89.465,78.71 89.846,78.329 89.967,78.329 90.373,77.923 116.211,77.923 v3(116.872,78.583) ; v3(116.993,51.31) 117.103,51.31 117.262,51.151 125.019,51.151 126.101,52.233 127.903,52.233 X8.10@129.16,50.976
  Bottom Layer w0.203: v3(116.872,78.583) 116.872,65.269 117.024,65.117 117.024,51.342 v3(116.993,51.31)
QUADSPI_CLK: IC8.6 X6.2 | length 56.9
  Top Layer w0.203: IC8.6@80.912,81.25 80.916,81.246 81.923,81.246 82.559,80.61 89.597,80.61 90.964,79.243 107.524,79.243 108.642,80.361 v3(115.5,80.361) ; v3(115.5,86.711) 125.019,86.711 126.1,87.791 127.904,87.791 X6.2@129.16,86.536
  Bottom Layer w0.203: v3(115.5,80.361) v3(115.5,86.711)
RIN1: C4_XLR2.1 IC2_XLR2.1 IC2_XLR2.5 J1_XLR2.2 R5.1 R6_XLR2.2 R65_XLR2.2 | length 78.7
  Top Layer w0.203: v1(223.012,68.834) 227.33,68.834 230.378,65.786 231.3,65.786 235.458,65.786 240.03,61.214 v1(246.38,61.214)
  Top Layer w0.254: v1(231.3,60.5) 231.3,65.786
  Bottom Layer w0.203: R5.1@204.582,70.788 208.456,70.788 213.584,75.916 R6_XLR2.2@217.733,75.916 ; IC2_XLR2.5@221.758,68.632 221.96,68.834 v1(223.012,68.834) ; v1(246.38,61.214) 248.92,58.674 248.92,55.372 249.468,54.824 249.468,54.511 249.682,54.297 249.682,50.8 250.355,50.127 250.355,48.649 250.484,48.52 J1_XLR2.2@250.484,45.472
  Bottom Layer w0.254: C4_XLR2.1@217.948,77.567 217.948,76.131 217.733,75.916 217.948,75.701 IC2_XLR2.1@217.948,74.056 217.948,72.552 219.229,71.271 220.643,71.271 221.758,70.156 IC2_XLR2.5@221.758,68.632 ; R65_XLR2.2@231.3,59.2 v1(231.3,60.5)
RIN2: C4_XLR4.1 IC2_XLR4.1 IC2_XLR4.5 J1_XLR4.2 R6.1 R6_XLR4.2 R65_XLR4.2 | length 127.5
  Top Layer w0.254: v1(224.07,134.071) 226.077,134.071 230.862,129.286 231.3,129.286 ; v1(231.3,124.4) 231.3,129.286 ; v1(245.841,124.973) 245.836,124.968 239.014,124.968 234.696,129.286 231.3,129.286
  Bottom Layer w0.203: 246.392,124.878 246.428,124.878 248.666,122.64 248.666,118.364 250.19,116.84 250.19,113.284 249.682,112.776 249.682,111.252 250.484,110.45 J1_XLR4.2@250.484,108.464
  Bottom Layer w0.254: R6.1@205.314,86.089 207.247,86.089 209.094,87.936 209.094,134.926 214.084,139.916 R6_XLR4.2@217.701,139.916 ; C4_XLR4.1@217.916,141.567 217.916,140.131 R6_XLR4.2@217.701,139.916 ; IC2_XLR4.5@221.726,132.632 221.726,132.644 221.726,134.156 220.611,135.271 219.197,135.271 217.916,136.552 IC2_XLR4.1@217.916,138.056 217.916,139.701 R6_XLR4.2@217.701,139.916 ; IC2_XLR4.5@221.726,132.677 221.924,132.875 222.874,132.875 v1(224.07,134.071) ; R65_XLR4.2@231.3,123.1 v1(231.3,124.4) ; v1(245.841,124.973) 245.909,124.905 246.365,124.905 246.392,124.878
RIN3: J3.5 R39.1 | length 95.5
  Bottom Layer w0.254: J3.5@139.85,150.927 140.051,150.815 142.179,146.492 cw(c140.996,145.308) 142.669,145.308 142.669,143.056 143.7,142.025 143.7,138.976 158.916,123.76 180.675,123.76 196.063,108.373 204.351,108.373 206.388,106.335 206.388,101.798 205.632,101.042 205.582,101.042 205.284,100.744 R39.1@205.284,100.694
ROUT1: J27.6 J29.5 U1.13 | length 112
  Top Layer w0.203: v1(160.528,30.352) 161.545,31.369 168.021,31.369 171.26,28.131 171.26,26.352 172.212,25.4 187.071,25.4 189.357,23.114 189.357,20.447 187.867,18.957 v1(187.104,18.957)
  Top Layer w0.254: v2(181.949,70.974) v2(192.749,70.974)
  Bottom Layer w0.203: v1(160.528,30.352) J27.6@160.528,32.385 ; v2@181.872,70.79 181.949,70.867 v2(181.949,70.974) ; J29.5@187.104,17.164 v1(187.104,18.957) 187.104,20.751 188.668,22.315 188.668,24.049 186.344,26.373 186.344,30.848 186.906,31.41 186.906,62.192 192.566,67.852 192.566,70.181 192.749,70.364 v2(192.749,70.974)
  Bottom Layer w0.254: U1.13@181.872,69.196 v2@181.872,70.79
ROUT2: J27.2 J30.5 U2.13 | length 124.1
  Top Layer w0.203: v1(163.068,30.352) 166.345,27.075 ; 166.346,27.075 169.672,23.749 v1(169.672,23.086) ; v2(181.974,90.405) v2@181.985,90.416 ; v2@192.234,90.416 v2(192.245,90.427)
  Top Layer w0.254: v2@181.985,90.416 v2@192.234,90.416
  Bottom Layer w0.203: v1(163.068,30.352) J27.2@163.068,32.385 ; J30.5@173.004,17.164 171.584,17.164 169.369,19.379 168.248,19.379 168.184,19.443 164.339,19.443 163.896,19.885 163.896,22.117 164.865,23.086 v1(169.672,23.086) 170.048,23.086 171.161,24.198 178.333,24.198 185.176,31.041 185.531,31.041 185.947,31.457 185.947,63.392 191.687,69.132 191.687,89.831 192.245,90.389 v2(192.245,90.427) ; v2@181.898,90.221 181.974,90.298 v2(181.974,90.405)
  Bottom Layer w0.254: U2.13@181.898,88.627 v2@181.898,90.221
ROUT3: C86.1 J31.5 U3.13 | length 149
  Top Layer w0.203: v1(183.9,42.2) 187.59,42.2 187.71,42.32 v1(187.82,42.32)
  Bottom Layer w0.203: J31.5@158.704,17.164 158.452,17.164 157.792,17.824 157.792,18.076 156.773,19.095 150.956,19.095 149.713,20.338 149.713,22.517 152.272,25.076 178.205,25.076 184.741,31.612 184.741,31.831 184.922,32.012 184.922,42.2 ; U3.13@181.872,109.328 181.872,111.047 182.693,111.868 187.456,111.868 190.144,109.18 190.144,69.866 184.922,64.644 184.922,42.2 ; v1(183.9,42.2) 184.922,42.2 ; v1(187.82,42.32) C86.1@189.2,42.32
SAI1_FS: IC3.4 J11.1 X5.8 | length 157.1
  Top Layer w0.203: v1(60.389,80.165) 60.794,79.76 60.794,36.414 66.728,30.48 131.826,30.48 135.128,33.782 v1(135.128,37.338) ; IC3.4@141.715,37.954 144.059,37.954 v2(144.639,37.374)
  Bottom Layer w0.203: v1(60.389,80.165) 60.467,80.243 60.675,80.243 60.697,80.264 63.218,80.264 63.269,80.213 63.731,80.213 63.782,80.264 65.969,80.264 66.814,79.419 66.814,79.136 67.009,78.941 X5.8@68.2,78.941 ; v1(135.128,37.338) 139.16,37.338 139.205,37.383 144.63,37.383 v2(144.639,37.374) 153.108,37.374 153.715,37.981 ; 153.72,37.986 J11.1@154.59,37.986
SAI1_FS_: R11.4 R12.8 R22.2 | length 89.7
  Top Layer w0.203: R22.2@158.733,37.869 158.757,37.845 v2@164.02,37.845 ; v2(164.912,75.198) 174.738,75.472 cw(c174.756,74.816) 175.039,75.408 175.384,75.243 ccw(c175.667,75.834) 175.813,75.195 v2(177.894,75.673) ; v2(165.928,90.74) 175.608,91.844 ccw(c175.395,93.707) 176.395,92.121 177.486,92.809 ccw(c176.919,93.707) 177.967,93.879 v2(177.808,94.85)
  Bottom Layer w0.203: v2(164.033,37.832) 165.199,72.921 cw(c166.26,72.885) 165.201,72.96 ; 165.201,72.96 165.24,73.514 ccw(c164.586,73.56) 165.228,73.695 v2(164.912,75.198) 164.912,75.219 cw(c165.115,75.219) 164.912,75.233 v2(165.928,90.74) ; R11.4@177.77,73.309 v2@177.77,75.441 ; R12.8@177.795,92.74 177.795,94.837 v2(177.808,94.85)
SAI1_FS_i: IC3.13 J11.2 R22.1 | length 7.6
  Top Layer w0.203: IC3.13@151.265,37.954 152.038,38.177 152.221,38.189 ccw(c152.182,38.797) 152.378,38.22 153.505,38.602 cw(c153.715,37.981) 153.89,38.613 156.111,37.998 ccw(c156.165,38.194) v2(156.165,37.991) 157.585,37.991 R22.1@157.733,37.869
  Bottom Layer w0.203: J11.2@155.29,37.986 156.16,37.986 v2(156.165,37.991)
SAI1_MCLK: IC4.5 J13.1 X5.6 | length 180.8
  Top Layer w0.203: v1(60.745,82.546) 61.15,82.141 61.15,36.561 66.723,30.988 131.318,30.988 134.366,34.036 v1(134.366,39.37) ; IC4.5@141.715,48.134 141.735,48.114 143.806,48.114 144.542,48.851 146.621,48.851 147.978,47.494 152.657,47.494 ccw(c152.657,47.697) 152.799,47.552 v2(153.767,48.52)
  Bottom Layer w0.203: v1(60.745,82.546) 65.093,82.546 65.182,82.635 66.138,82.635 66.814,81.959 66.814,81.776 67.109,81.481 X5.6@68.2,81.481 ; v1(134.366,39.37) 134.379,39.383 142.955,39.383 151.304,39.383 156.964,45.043 156.964,46.835 156.32,47.479 154.796,47.479 154.642,47.633 J13.1@154.642,48.525 v2@153.772,48.525
SAI1_MCLK_: J28.2 R27.2 | length 27.6
  Top Layer w0.203: R27.2@158.733,48.479 158.749,48.495 v2(176.005,48.495)
  Bottom Layer w0.203: v2(176.005,48.495) 176.005,56.555 177.145,57.695 177.145,57.934 177.293,58.082 J28.2@177.532,58.082
SAI1_MCLK_i: IC4.12 J13.2 R27.1 | length 7.7
  Top Layer w0.203: IC4.12@151.265,48.134 152.038,48.357 152.335,48.357 ccw(c152.335,48.967) 152.728,48.501 153.344,49.021 cw(c153.767,48.52) 153.942,49.152 156.163,48.537 ccw(c156.217,48.733) v2(156.217,48.53) 157.585,48.53 R27.1@157.733,48.479
  Bottom Layer w0.203: J13.2@155.342,48.525 156.212,48.525 v2(156.217,48.53)
SAI1_SCK: IC3.3 J12.1 X5.10 | length 160.2
  Top Layer w0.203: v1(59.766,77.651) 59.766,61.955 60.083,61.638 60.083,36.119 66.993,29.21 133.35,29.21 136.652,32.512 136.652,37.592 v1(135.89,38.354) ; IC3.3@141.715,39.224 143.794,39.224 v2(144.698,38.32)
  Bottom Layer w0.203: v1(59.766,77.651) 59.84,77.724 65.969,77.724 66.814,76.879 66.814,76.873 67.15,76.537 68.064,76.537 X5.10@68.2,76.401 ; v1(135.89,38.354) 139.417,38.354 139.446,38.383 v2@144.698,38.383 ; v2(144.698,38.32) 152.454,38.32 153.715,39.581 ; 153.72,39.586 J12.1@154.59,39.586
SAI1_SCK_: R11.1 R12.5 R21.2 | length 87.9
  Top Layer w0.203: R21.2@158.733,39.224 161.019,39.224 v2(163.305,39.224) ; v2(164.586,73.56) 165.507,74.244 cw(c165.897,73.717) 165.865,74.372 v2(174.756,74.816) ; 165.432,91.799 175.46,92.24 ccw(c175.395,93.707) 176.179,92.465 177.269,93.152 ccw(c176.919,93.707) 177.465,94.071 176.703,95.214 ccw(c176.157,94.85) 175.504,94.909 v2(175.395,93.707)
  Bottom Layer w0.203: v2(163.305,39.224) 164.592,72.249 ccw(c163.937,72.275) 164.588,72.353 164.469,73.351 cw(c164.67,73.375) v2(164.586,73.56) ; v2(165.299,91.483) 164.257,75.24 ccw(c164.912,75.198) 164.269,75.066 164.37,74.57 cw(c163.329,74.359) 164.39,74.406 164.419,73.751 ccw(c164.622,73.76) v2(164.586,73.56) ; v2(174.756,74.816) 174.83,74.816 175.37,74.276 R11.1@175.37,73.309 ; R12.5@175.395,92.74 v2(175.395,93.707) ; v2@164.467,73.56 v2(164.586,73.56) ; v2@164.467,73.56 v2(164.586,73.56) ; v2@164.467,73.56 v2(164.586,73.56)
SAI1_SCK_i: IC3.14 J12.2 R21.1 | length 7.8
  Top Layer w0.203: IC3.14@151.265,39.224 152.038,39.447 153.412,40.163 cw(c153.715,39.581) 153.89,40.213 156.111,39.598 ccw(c156.165,39.794) v2(156.165,39.591) cw(c156.165,39.388) 156.189,39.59 157.585,39.422 R21.1@157.733,39.224
  Bottom Layer w0.203: J12.2@155.29,39.586 156.16,39.586 v2(156.165,39.591)
SAI1_SD_A: IC3.6 J9.1 X7.2 | length 142.7
  Top Layer w0.203: v1(58.832,62.387) 59.728,61.491 59.728,35.972 67.252,28.448 133.858,28.448 137.414,32.004 v1(137.414,35.306) ; IC3.6@141.715,35.414 v2(144.636,35.414)
  Bottom Layer w0.203: v1(58.832,62.387) 58.91,62.465 59.12,62.465 59.139,62.484 66.877,62.484 X7.2@68.2,61.161 ; v1(137.414,35.306) 138.114,35.306 138.18,35.24 142.812,35.24 142.955,35.383 144.636,35.383 152.033,35.383 152.51,34.906 153.666,34.906 153.715,34.857 ; 153.72,34.862 J9.1@154.59,34.862
SAI1_SD_A_: R11.3 R24.2 | length 56
  Top Layer w0.203: R24.2@158.733,35.059 158.77,35.022 v2@165.072,35.022 ; v2(166.26,72.885) 166.936,73.104 cw(c167.138,72.481) 167.085,73.134 174.841,73.758 ccw(c174.756,74.816) 175.024,73.789 v2(176.894,74.276)
  Bottom Layer w0.203: v2(165.083,35.033) 165.698,58.292 cw(c166.353,58.274) 165.698,58.294 166.074,71.756 cw(c166.683,71.739) 166.082,71.841 v2(166.26,72.885) ; v2(176.894,74.276) 176.894,74.169 176.97,74.093 R11.3@176.97,73.309
SAI1_SD_A_i: IC3.11 J9.2 R24.1 | length 7.5
  Top Layer w0.203: IC3.11@151.265,35.414 152.038,35.513 153.715,35.513 cw(c153.715,34.857) 153.89,35.489 156.111,34.874 ccw(c156.165,35.07) v2(156.165,34.867) 157.585,34.867 R24.1@157.733,35.059
  Bottom Layer w0.203: J9.2@155.29,34.862 156.16,34.862 v2(156.165,34.867)
SAI1_SD_B: IC3.5 J10.1 X5.7 | length 153
  Top Layer w0.203: v1(60.056,78.874) 60.439,78.491 60.439,36.267 66.987,29.718 132.588,29.718 135.89,33.02 v1(135.89,36.322) ; IC3.5@141.715,36.684 144.253,36.684 v2(144.57,36.368) v2(144.57,36.368)
  Bottom Layer w0.203: v1(60.056,78.874) 60.122,78.941 X5.7@65.66,78.941 ; v1(135.89,36.322) 135.951,36.383 144.555,36.383 v2(144.57,36.368) 144.585,36.383 153.722,36.383 153.729,36.376 ; 153.734,36.381 J10.1@154.604,36.381
SAI1_SD_B_: R11.2 R23.2 | length 62.2
  Top Layer w0.203: R23.2@158.733,36.514 158.758,36.539 164.43,36.539 v2(164.448,36.557) ; v2(165.897,73.717) 174.789,74.162 ccw(c174.756,74.816) 175.005,74.21 176.645,74.883 cw(c176.894,74.276) 176.841,74.929 177.947,75.02 ccw(c177.894,75.673) 177.748,76.312 v2(175.667,75.834)
  Bottom Layer w0.203: v2(164.448,36.557) 164.676,37.704 ccw(c164.033,37.832) 164.689,37.815 165.605,72.902 cw(c166.26,72.885) 165.655,73.138 v2(165.897,73.717) ; v2(175.667,75.834) 176.17,75.331 R11.2@176.17,73.309
SAI1_SD_B_i: IC3.12 J10.2 R23.1 | length 7.5
  Top Layer w0.203: IC3.12@151.265,36.684 152.038,36.907 152.221,36.919 ccw(c152.182,37.527) 152.228,36.92 153.679,37.03 cw(c153.729,36.376) 153.904,37.008 156.125,36.393 ccw(c156.179,36.589) v2(156.179,36.386) 157.585,36.386 R23.1@157.733,36.514
  Bottom Layer w0.203: J10.2@155.304,36.381 v2@156.174,36.381
SAI2_SD_A: IC4.6 J14.1 X6.5 | length 85
  Top Layer w0.203: v1@130.81,80.211 130.81,40.793 131.122,40.481 v1(131.122,40.371) ; IC4.6@141.715,46.864 143.727,46.864 143.98,46.611 143.98,46.572 144.364,46.188 144.908,46.188 144.953,46.234 152.182,46.234 ccw(c152.182,46.437) 152.194,46.235 v2(153.767,46.336)
  Bottom Layer w0.203: X6.5@126.62,81.456 126.704,81.372 127.67,81.372 128.006,81.036 128.006,80.978 128.682,80.302 130.772,80.302 v1(130.81,80.264) v1@130.81,80.211 ; v1(131.122,40.371) 131.137,40.356 150.975,40.356 153.767,43.148 v2(153.767,46.336) ; v2@153.772,46.341 J14.1@154.642,46.341
SAI2_SD_A_: R12.7 R28.2 | length 62.7
  Top Layer w0.203: R28.2@158.733,47.024 162.838,47.024 v2(162.86,47.046) ; v2(164.641,92.027) 165.337,92.194 cw(c165.432,91.799) 165.414,92.205 175.442,92.646 ccw(c175.395,93.707) 176.135,92.945 v2(176.919,93.707)
  Bottom Layer w0.203: v2(162.86,47.046) 163.169,49.819 ccw(c162.518,49.892) 163.173,49.868 163.937,72.269 ccw(c163.734,72.275) v2(163.937,72.275) 163.931,73.557 cw(c164.586,73.56) 163.932,73.607 163.983,74.312 ccw(c163.329,74.359) 163.972,74.49 163.871,74.987 cw(c164.912,75.198) 163.851,75.248 v2(164.641,92.027) ; R12.7@176.995,92.74 v2@176.995,93.524
SAI2_SD_A_i: IC4.11 J14.2 R28.1 | length 7.6
  Top Layer w0.203: IC4.11@151.265,46.864 152.038,46.992 153.767,46.992 cw(c153.767,46.336) 153.942,46.968 156.163,46.353 ccw(c156.217,46.549) 156.215,46.346 v2(156.217,46.346) ccw(c156.217,46.549) 156.286,46.358 157.585,46.826 R28.1@157.733,47.024
  Bottom Layer w0.203: J14.2@155.342,46.341 156.212,46.341 v2(156.217,46.346)
SAI2_SD_B: IC4.4 J15.1 X4.8 | length 195.8
  Top Layer w0.203: v1(62.326,100.501) 62.326,100.391 62.484,100.232 62.484,98.834 62.535,98.783 62.535,98.321 62.484,98.27 62.484,89.154 61.637,88.307 61.637,36.577 66.464,31.75 130.81,31.75 133.604,34.544 v1(133.604,41.148) ; IC4.4@141.724,49.395 147.292,49.395 147.923,48.764 152.335,48.764 ccw(c152.335,48.967) 152.477,48.822 v2(153.777,50.122)
  Bottom Layer w0.203: v1(62.326,100.501) 65.992,100.501 66.814,101.323 66.814,102.955 X4.8@68.2,104.341 ; v1(133.604,41.148) 136.766,41.148 137.01,40.905 137.469,40.905 137.947,41.383 150.478,41.383 153.111,44.016 153.111,49.604 153.777,50.27 v2(153.777,50.122) ; v2@153.782,50.127 J15.1@154.652,50.127
SAI2_SD_B_: R12.6 R26.2 | length 62.3
  Top Layer w0.203: R26.2@158.733,49.834 162.46,49.834 v2(162.518,49.892) ; v2(163.329,74.359) v2@163.358,74.359 ; v2(163.937,92.561) 164.519,92.671 cw(c164.641,92.027) 164.619,92.682 175.418,93.052 ccw(c175.395,93.707) 176.048,93.648 v2(176.157,94.85)
  Bottom Layer w0.203: v2(162.518,49.892) v2(163.329,74.359) v2(163.937,92.561) ; v2(176.157,94.85) 176.195,94.812 R12.6@176.195,92.74
SAI2_SD_B_i: IC4.13 J15.2 R26.1 | length 8
  Top Layer w0.203: IC4.13@151.265,49.404 152.038,49.627 152.172,49.627 ccw(c152.172,50.237) 152.602,49.805 152.643,49.847 ccw(c152.14,50.349) 152.668,49.872 153.291,50.562 cw(c153.777,50.122) 153.951,50.754 156.188,50.139 ccw(c156.242,50.335) v2(156.227,50.132) 157.585,50.032 R26.1@157.733,49.834
  Bottom Layer w0.203: J15.2@155.352,50.127 156.222,50.127 v2(156.227,50.132)
SDCKE0: U4.37 X4.17 | length 64.8
  Top Layer w0.203: X4.17@65.66,91.641 66.916,92.896 77.057,92.896 78.097,91.856 109.335,91.856 109.589,92.11 v3(109.658,92.11) ; U4.37@97.601,100.021 109.243,100.021 109.345,99.919 v3(109.455,99.919)
  Bottom Layer w0.203: v3(109.455,99.919) 109.455,99.809 109.658,99.606 v3(109.658,92.11)
SDCKE1: U5.37 X3.9 | length 50.2
  Top Layer w0.203: U5.37@97.72,123.883 106.009,123.883 106.111,123.781 v3(106.983,123.781) ; v3(107.372,102.713) 123.882,102.713 124.819,101.776 X3.9@126.62,101.776
  Bottom Layer w0.203: v3(106.983,123.781) 106.983,123.004 107.288,122.699 107.288,102.797 v3(107.372,102.713)
SDCLK: U4.38 U5.38 X8.6 | length 111.7
  Top Layer w0.203: U4.38@97.601,100.821 v3@107.402,100.821 ; U5.38@97.72,124.683 106.505,124.683 106.619,124.797 v3(107.745,124.797) ; v3(113.976,63.851) 114.484,63.851 116.77,61.565 116.77,58.517 115.414,57.161 115.414,55.637 116.251,54.8 127.904,54.8 X8.6@129.16,56.056
  Bottom Layer w0.203: v3(107.626,100.935) 107.626,64.359 108.134,63.851 v3(113.976,63.851) ; v3@107.745,101.164 107.745,101.932 108.032,102.219 108.032,102.987 107.745,103.274 v3(107.745,124.797)
SDNCAS: U4.17 U5.17 X7.4 | length 87.3
  Top Layer w0.203: X7.4@68.2,58.621 68.35,58.771 v3(82.226,58.771) ; v3(82.345,124.797) 82.455,124.797 82.569,124.683 U5.17@86.02,124.683 ; v3@82.45,100.821 U4.17@85.901,100.821
  Bottom Layer w0.203: v3(82.226,58.771) 82.243,58.788 82.243,70.954 82.256,70.967 82.256,71.515 82.243,71.528 v3(82.243,100.935) 82.243,101.045 82.345,101.147 v3(82.345,124.797)
SDNE0: U4.19 X4.15 | length 23.4
  Top Layer w0.203: X4.15@65.66,94.181 66.916,95.436 66.916,97.212 67.709,98.005 68.72,98.005 69.936,99.221 U4.19@85.901,99.221
SDNE1: U5.19 X1.17 | length 60.2
  Top Layer w0.203: v3(80.702,123.033) 80.752,123.083 U5.19@86.02,123.083 ; v3(80.769,115.092) 80.835,115.159 81.69,115.159 81.741,115.108 89.363,115.108 89.567,115.311 97.189,115.311 97.392,115.108 124.712,115.108 X1.17@126.62,117.016
  Bottom Layer w0.203: v3(80.702,123.033) 80.702,115.159 v3(80.769,115.092)
SDNRAS: U4.18 U5.18 X8.2 | length 116.5
  Top Layer w0.203: v3(81.437,71.201) 82.804,71.201 83.836,72.233 87.352,72.233 88.547,73.428 88.562,73.428 88.641,73.507 89.302,73.507 90.068,72.741 93.148,72.741 95.18,70.709 95.18,70.586 95.615,70.15 107.877,70.15 109.401,68.626 113.011,68.626 120.072,61.565 122.93,61.565 124.615,59.88 127.904,59.88 X8.2@129.16,61.136 ; v3(81.583,124.035) 81.693,124.035 81.845,123.883 U5.18@86.02,123.883 ; v3@81.726,100.021 U4.18@85.901,100.021
  Bottom Layer w0.203: v3(81.437,71.201) 81.464,71.228 v3(81.464,100.173) 81.464,100.283 81.583,100.402 81.583,101.241 81.616,101.275 81.616,104.405 81.583,104.439 v3(81.583,124.035)
SDNWE: U4.16 U5.16 X4.18 | length 57.6
  Top Layer w0.203: X4.18@68.2,91.641 70.336,89.505 v3(82.988,89.505) ; v3(83.005,101.697) 83.081,101.621 U4.16@85.901,101.621 ; v3(83.107,125.559) 83.183,125.483 U5.16@86.02,125.483
  Bottom Layer w0.203: v3(82.988,89.505) 82.988,101.68 v3(83.005,101.697) 83.005,101.807 83.107,101.909 v3(83.107,125.559)
SPI1_MISO: X7.3 X10.1 X10.2 | length 111.6
  Top Layer w0.203: X10.1@57.15,153.67 60.031,153.67 62.593,151.108 62.593,121.981 62.191,121.579 62.191,119.668 62.755,119.104 62.755,103.348 58.287,98.88 58.287,63.136 57.917,62.766 57.917,62.008 58.268,61.658 58.268,58.776 v1(58.166,58.674)
  Bottom Layer w0.203: X10.1@57.15,153.67 X10.2@59.69,153.67 ; v1(58.166,58.674) 65.607,58.674 X7.3@65.66,58.621
SPI1_MOSI: X5.5 X10.3 X10.4 | length 84.3
  Top Layer w0.203: X10.3@57.15,151.13 X10.4@59.69,151.13 62.237,148.583 62.237,122.128 61.836,121.726 61.836,119.52 62.399,118.957 62.399,103.606 57.932,99.138 57.932,81.554 v1(57.517,81.139)
  Bottom Layer w0.203: v1(57.517,81.139) 57.859,81.481 X5.5@65.66,81.481
SPI1_NSS: X7.6 X10.7 X10.8 | length 107.6
  Top Layer w0.203: v1(57.15,56.337) 57.15,80.213 56.602,80.76 56.602,82.002 57.221,82.621 57.221,99.433 61.688,103.9 61.688,112.284 61.265,112.707 61.265,118.872 61.124,119.012 61.124,122.338 61.526,122.74 61.526,144.214 X10.8@59.69,146.05 X10.7@57.15,146.05
  Bottom Layer w0.203: v1(57.15,56.337) 64.284,56.337 65.182,57.235 67.046,57.235 X7.6@68.2,56.081
SPI1_SCK: X7.10 X10.5 X10.6 | length 114.9
  Top Layer w0.203: X10.5@57.15,148.59 X10.6@59.69,148.59 60.176,148.59 60.631,148.135 60.653,148.135 61.882,146.906 61.882,122.354 61.48,121.953 61.48,119.16 61.62,119.019 61.62,112.854 62.043,112.431 62.043,103.753 57.576,99.286 57.576,82.214 56.958,81.596 56.958,80.907 57.607,80.258 57.607,62.958 57.562,62.913 57.562,61.861 57.607,61.815 57.607,58.443 58.166,57.884 v1(58.166,51.562)
  Bottom Layer w0.203: v1(58.166,51.562) 62.721,51.562 62.975,51.308 64.191,51.308 65.14,52.256 66.944,52.256 X7.10@68.2,51.001